# Altium PCB Dispenser.PcbDoc
Units mm, origin at the board's own origin, x right, y up, seen from the top; angles counter-clockwise.
Board outline 50.85 x 51.59 mm, 2 copper layers (Top Layer, Bottom Layer); 15 components, 16 nets, 77 pads, 11 vias.
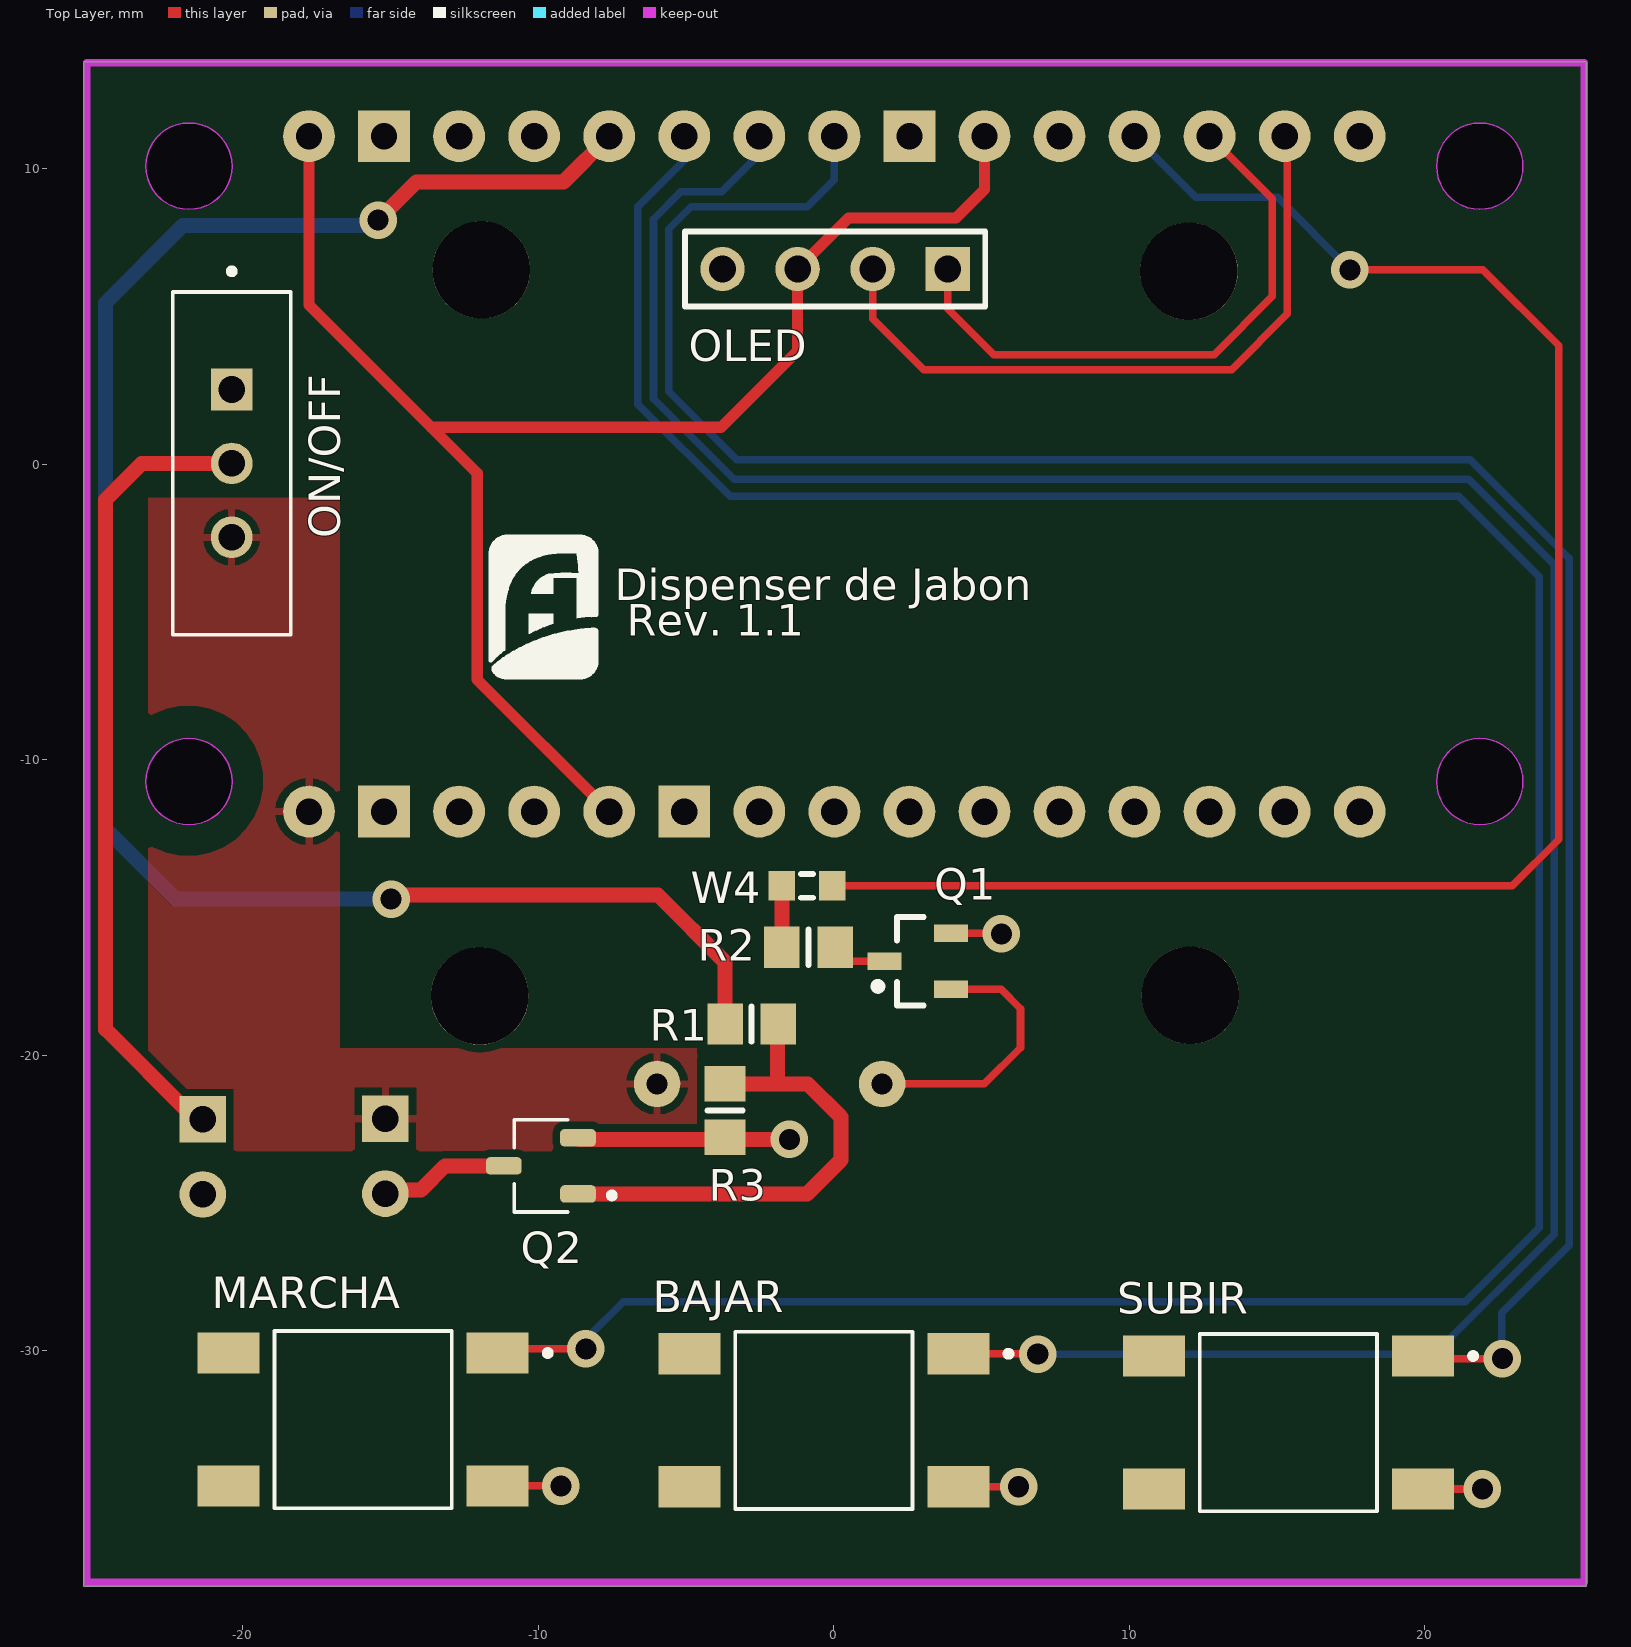
[diagram p0: Top Layer view]
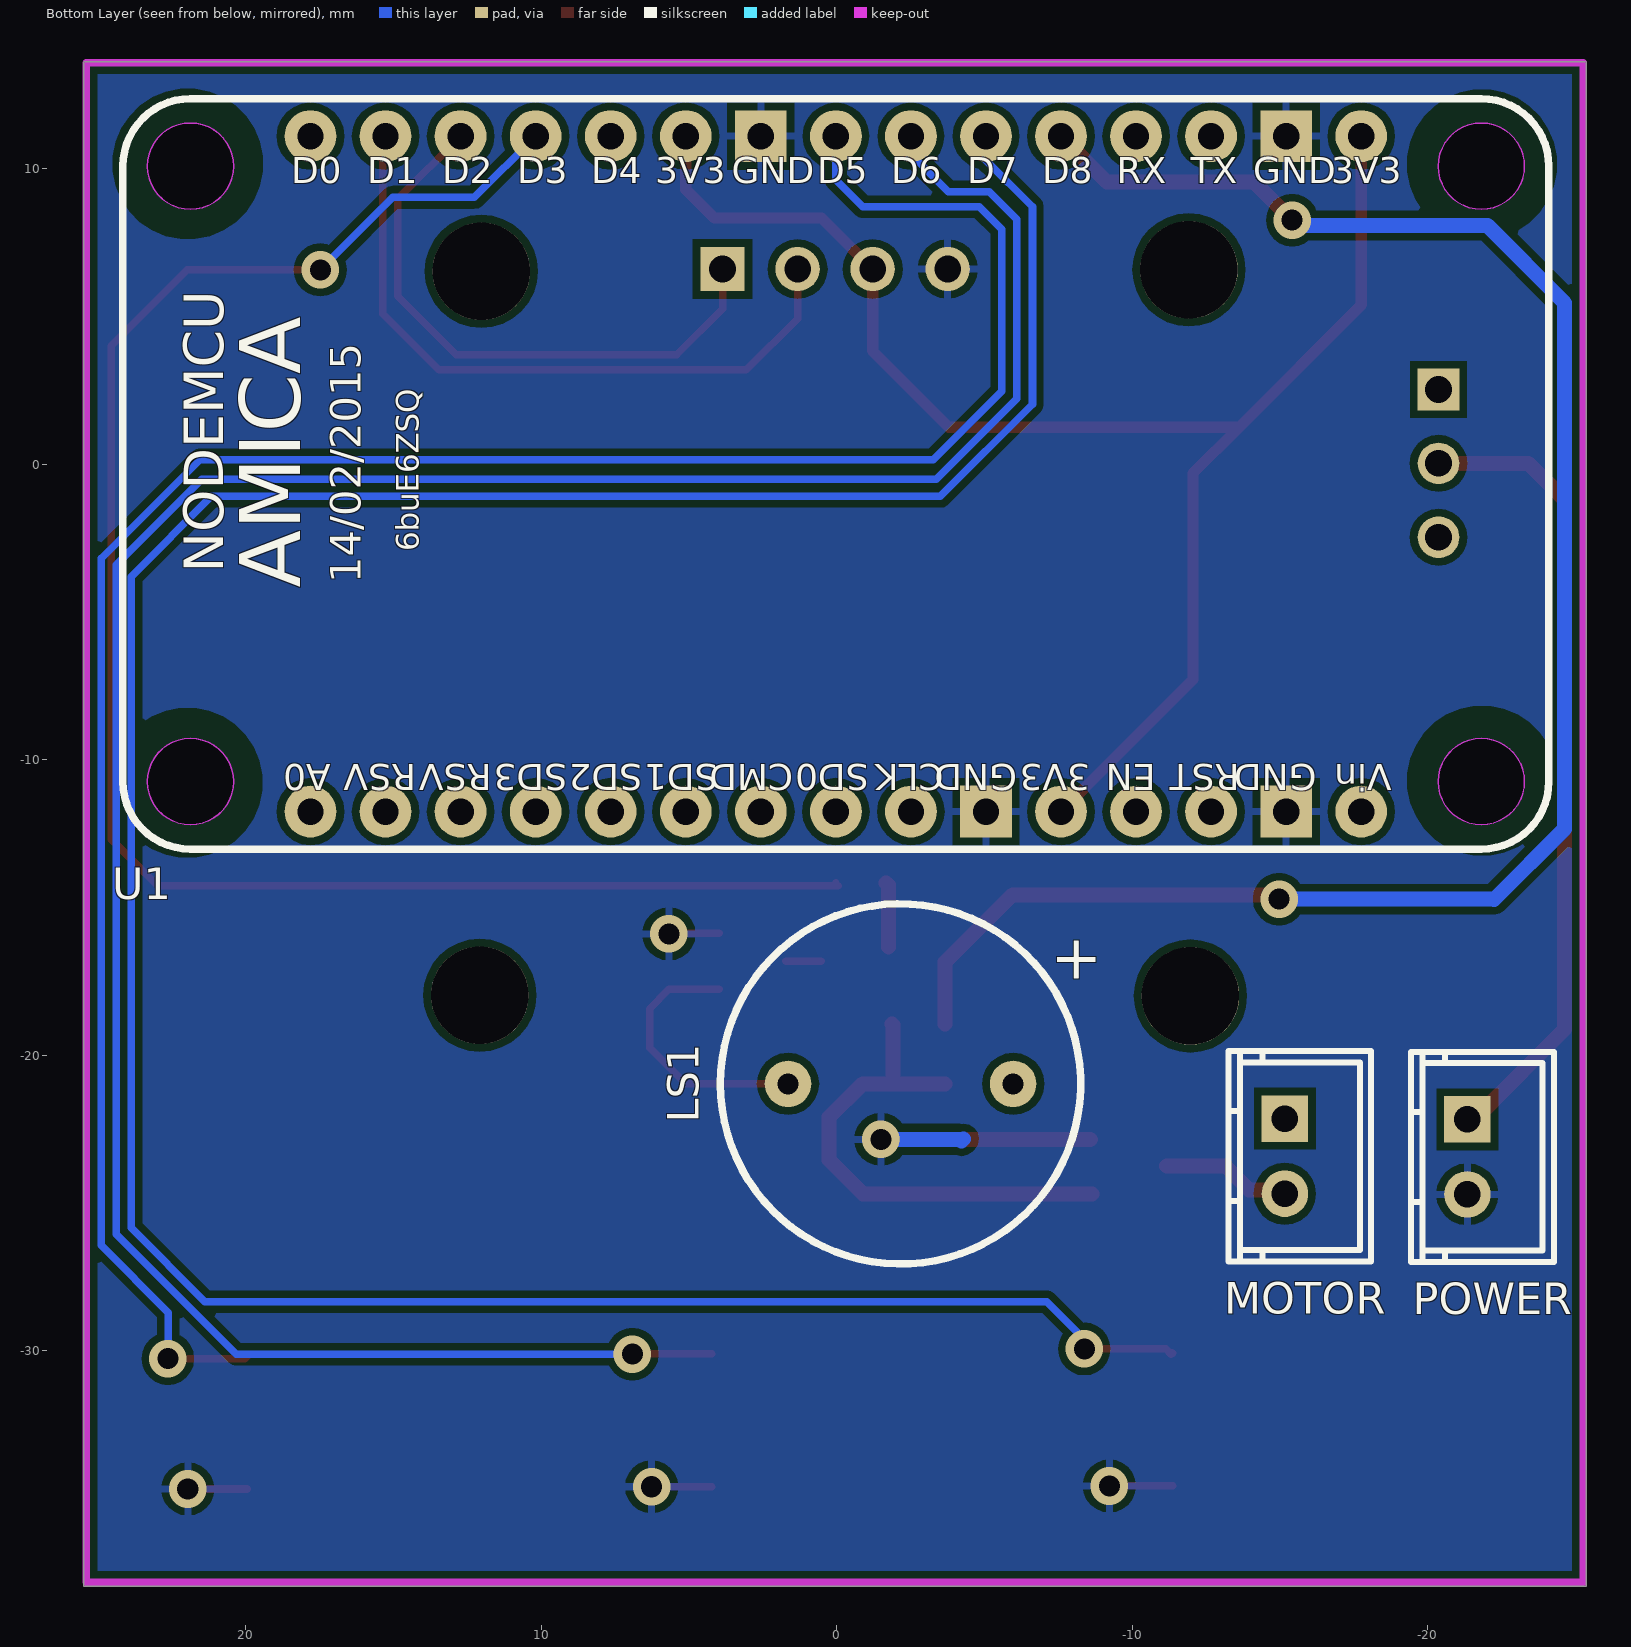
[diagram p1: Bottom Layer view, seen from below]

## Layer stack, top to bottom
Top Solder: solder mask 0.0102, Solder Resist, Dk 3.5
Top Layer: signal copper 0.0356
Dielectric 1: dielectric 0.32, FR-4, Dk 4.8
Bottom Layer: signal copper 0.0356
Bottom Solder: solder mask 0.0102, Solder Resist, Dk 3.5

## Board outline
-25.375,13.614 -25.375,-37.973 25.476,-37.973 25.476,13.614

## Design rules (kind name [scope] priority, off if disabled: settings)
Clearance [All] p1: gap=0.254
HoleSize [All] p1: absolutevalues=TRUE maxlimit=5.08 minlimit=0.025 maxpercent=80.000 minpercent=20.000
PolygonConnect [All] p1: connectstyle=Relief reliefconductorwidth=0.254 reliefentries=4 polygonreliefangle="90 Angle" airgapwidth=0.254
RoutingVias [All] p1: holewidth=0.711 width=1.27 viastyle="Through Hole" minholewidth=0.406 minwidth=0.813 maxholewidth=0.711 maxwidth=1.27
SolderMaskExpansion [All] p1: expansion=0.102
Width [All] p1: maxlimit=0.635 minlimit=0.254 preferedwidth=0.254
29 further rules are at their usual default settings.

## Components (designator, comment, footprint, x,y, rotation, side; value= is the part's Value field where it differs from the comment)
BAJAR "RESTAR_LITROS" SW_TL3301FF160QG -0.33,-32.36 r180 top (schematic designator S3)
LS1 "Buzzer 3V" BUZZER -5.975,-20.975 r180 bottom
MARCHA "MARCHA" SW_TL3301FF160QG -15.926,-32.334 r180 top (schematic designator S1)
MOTOR "MOTOR" CON1X2 -15.173,-22.152 r270 bottom (schematic designator P3)
OLED "Oled" HDR1X4 3.861,6.604 r180 top (schematic designator P2)
ON/OFF "POWER" SW_MINI-SPDT-SW -20.371,0.025 r270 top (schematic designator S4)
POWER "+5V" CON1X2 -21.35,-22.175 r270 bottom (schematic designator P1)
Q1 "MMBT3904" SOT23_N 2.85,-16.825 r180 top
Q2 "AO3402" SOT95P280X125-3N -9.906,-23.749 r180 top
R1 "1k" RESC2012N -2.775,-18.95 r0 top
R2 "1k" RESC2012N -0.85,-16.35 r0 top
R3 "10k" RESC2012N -3.675,-21.875 r90 top
SUBIR "SUMAR_LITROS" SW_TL3301FF160QG 15.392,-32.436 r180 top (schematic designator S2)
U1 "NodeMCU V1.0 ESP-12E" "NodeMCU V1.0 ESP-12E" 17.805,11.1 r90 bottom
W4 "Jumper" RESC1608N -0.9,-14.275 r180 top

## Footprints (in the part's own frame and the unit in brackets; to place one, negate y for a bottom-side part, rotate by r counter-clockwise, add the part's x,y. Pads: shape width x height; smd on the part's side, far side on the other; paste and mask are expansions set on the pad)
BUZZER [mil]
  round 62 hole 28: 1(0,0) 2(-300,0)
  silkscreen extent -390,-240 90,240
CON1X2 [mil] "Connector; Header; 2 Position"
  rect 62x62 hole 35.43: 1(0,0)
  round 62 hole 35.43: 2(100,0)
  silkscreen extent -90,-75 190,115, body extent -93,-88 199,138, height 276
HDR1X4 [mm] "Connector; Header; 4 Position"
  rect 1.5x1.5 hole 0.9: 1(0,0)
  round 1.5 hole 0.9: 2(2.54,0) 3(5.08,0) 4(7.62,0)
  silkscreen extent -1.27,-1.27 8.89,1.27
"NodeMCU V1.0 ESP-12E" [mil]
  round 115 hole 115 unplated paste-300 mask-300: 0(-860,-1560) 0(-860,160) 0(-40,-1560) 0(-40,160)
  round 69 hole 35: 3V3(-900,-1000) 3V3(0,-1400) 3V3(0,-500) A0(-900,0) CLK(-900,-800) CMD(-900,-600) D0(0,0) D1(0,-100) D2(0,-200) D3(0,-300) D4(0,-400) D5(0,-700) D6(0,-800) D7(0,-900) D8(0,-1000) EN(-900,-1100) RST(-900,-1200) RSV(-900,-200) RSV(-900,-100) RX(0,-1100) SD0(-900,-700) SD1(-900,-500) SD2(-900,-400) SD3(-900,-300) TX(0,-1200) VIN(-900,-1400)
  rect 69x69 hole 35: GND(-900,-1300) GND(-900,-900) GND(0,-1300) GND(0,-600)
  Keep-Out Layer circle w2: c-860,160 r57.5
  Keep-Out Layer circle w2: c-40,160 r57.5
  Keep-Out Layer circle w2: c-860,-1560 r57.5
  Keep-Out Layer circle w2: c-40,-1560 r57.5
  silkscreen extent -950,-1650 50,250
RESC1608N [mm] "Chip Resistor, Body 1.6x0.8mm, IPC Medium Density"
  rect 0.9x1 smd: 1(-0.85,0) 2(0.85,0)
  silkscreen extent -0.2,-0.4 0.2,0.4, body extent -0.85,-0.48 0.85,0.48, height 0.6
RESC2012N [mm] "Chip Resistor, Body 2.0x1.3mm, IPC Medium Density"
  rect 1.2x1.4 smd: 1(-0.9,0) 2(0.9,0)
  silkscreen extent 0,-0.6 0,0.6, body extent -1.07,-0.7 1.07,0.7, height 0.65
SOT23_N [mm] "SOT23, 3-Leads, Body 2.9x1.3mm, Pitch 0.95mm, Lead Span 2.3mm - Reverse Pinning, IPC Medium Density"
  rect 1.15x0.6 smd: 1(1.125,0) 2(-1.125,-0.95) 3(-1.125,0.95)
  silkscreen extent -0.2,-1.5 1.47,1.5, body extent -0.7,-1.5 0.7,1.5, height 1.1
SOT95P280X125-3N [mm]
  rrect50% 1.21x0.59 smd: 1(-1.255,0.95) 2(-1.255,-0.95) 3(1.255,0)
  silkscreen extent -2.5,-1.56 0.9,1.56
SW_MINI-SPDT-SW [mm]
  rect 1.408x1.408 hole 0.9: 1(-2.5,0)
  round 1.408 hole 0.9: 2(0,0) 3(2.5,0)
  silkscreen extent -6.6,-2 5.8,2
SW_TL3301FF160QG [mm]
  rect 2.1x1.4 smd: 1(-4.55,-2.25) 2(4.55,-2.25) 3(-4.55,2.25) 4(4.55,2.25)
  silkscreen extent -6.35,-3 3,3, body extent -5,-3 5,3, height 7.1

## Part data
BAJAR MARCHA SUBIR: library part TL3301FF160QG, "SWITCH TACTILE SPST-NO 0.05A 12V"
LS1: library part Bell, "Electrical Bell"
MOTOR POWER: library part "Header 2", "Header, 2-Pin"
OLED: library part "Header 4", "Header, 4-Pin"
ON/OFF: library part MINI-SPDT-SW, "Simple breadboard friendly SPDT slide switch. Rated at 30V/200mA with operating force of 250 +/-100gf."
Q1: "NPN Switching Transistor"
Q2: "N-Channel 30V 4A _Ta_ 1.4W _Ta_ Surface Mount SOT-23-3L"
R1 R2 R3: library part Res1, "Resistor"
U1: "NodeMCU V1.0 ESP8266 (ESP-12E)"
W4: "Jumper Wire"

## Free pads (board coordinates)
  round 3.3 hole 3.3 unplated paste-7.62 mask-7.62: 2(-11.975,-18) 2(-11.925,6.575) 2(12.025,6.525) 2(12.075,-17.975)

## Via types
v1: diameter 1.27, hole 0.711, Top Layer to Bottom Layer, 11 vias

## Nets (pads, with @x,y where several pads share a name; then routed paths per layer and width w, separated by ;. In a path a pad name is that pad's centre, name@x,y a point inside that pad or via, vN(x,y) a via of type N, cw(c..) or ccw(c..) an arc to the next point about the centre after c; other vN are vias at no path point)
3V3: OLED.3 U1.3V3 | length 52.5
  Top Layer w0.381: U1.3V3@-17.755,11.1 -17.755,5.385 -13.614,1.245 ; U1.3V3@-7.595,-11.76 -12.065,-7.29 -12.065,-0.305 -13.614,1.245 ; U1.3V3@5.105,11.1 5.105,9.296 4.14,8.331 0.508,8.331 OLED.3 -1.219,3.835 -3.81,1.245 -13.614,1.245
+5V: LS1.1 MOTOR.1 ON/OFF.3 U1.VIN
BTN_+L: SUBIR.1 U1.D5 | length 76.8
  Top Layer w0.254: SUBIR.1 20.033,-30.277 v1(22.631,-30.277)
  Bottom Layer w0.254: U1.D5 0.025,9.627 -0.889,8.712 -4.826,8.712 -5.588,7.95 -5.588,2.464 -3.277,0.152 21.546,0.152 24.892,-3.193 24.892,-26.441 22.619,-28.715 22.619,-30.264 v1(22.631,-30.277)
BTN_-L: BAJAR.1 U1.D6 | length 88.5
  Top Layer w0.254: BAJAR.1 6.894,-30.11 v1(6.909,-30.124)
  Bottom Layer w0.254: U1.D6@-2.337,11.049 -2.337,10.668 -3.785,9.22 -5.167,9.22 -6.096,8.291 -6.096,2.217 -3.371,-0.508 21.488,-0.508 24.384,-3.404 24.384,-26.06 20.32,-30.124 v1(6.909,-30.124)
BTN_MOT: MARCHA.1 U1.D7 | length 101.9
  Top Layer w0.254: MARCHA.1 -11.365,-30.074 -11.314,-30.124 -11.137,-29.947 v1(-8.382,-29.947)
  Bottom Layer w0.254: v1(-8.382,-29.947) -8.382,-29.616 -7.112,-28.346 21.38,-28.346 23.876,-25.85 23.876,-3.81 21.158,-1.092 -3.505,-1.092 -6.629,2.032 -6.629,8.712 -5.055,10.287 U1.D7
BUZZER: U1.D3 W4.1 | length 59.3
  Top Layer w0.254: W4.1 22.975,-14.275 24.55,-12.7 24.55,4 21.975,6.575 v1(17.475,6.575)
  Bottom Layer w0.254: U1.D3 12.26,9.025 15.025,9.025 v1(17.475,6.575)
GND: BAJAR.3 MARCHA.3 OLED.4 POWER.2 Q1.2 Q2.2 R3.1 SUBIR.3 U1.GND | length 17.9
  Top Layer w0.254: MARCHA.3 v1(-9.231,-34.584) ; Q1.2 v1@5.65,-15.875 ; BAJAR.3 v1(6.263,-34.61) ; SUBIR.3 v1(21.96,-34.686)
  Top Layer w0.508: Q2.2@-8.6,-22.85 v1(-1.5,-22.85) ; v1@5.65,-15.875 v1(5.675,-15.9)
  Bottom Layer w0.508: -4.293,-22.835 -4.227,-22.9 -4.177,-22.85 v1(-1.5,-22.85)
NetLS1_2: LS1.2 Q1.3 | length 9.4
  Top Layer w0.254: LS1.2@1.645,-20.375 2.245,-20.975 5.1,-20.975 6.325,-19.75 6.325,-18.425 5.675,-17.775 Q1.3
NetP1_1: ON/OFF.2 POWER.1 | length 27.2
  Top Layer w0.508: POWER.1@-21.3,-21.975 -21.789,-21.975 -24.638,-19.126 -24.638,-1.194 -23.419,0.025 ON/OFF.2
NetP3_2: MOTOR.2 Q2.3 | length 4.5
  Top Layer w0.508: MOTOR.2@-15.3,-24.565 -13.965,-24.565 -13.149,-23.749 Q2.3
NetQ1_1: Q1.1 R2.2 | length 1.2
  Top Layer w0.254: R2.2@0.525,-16.825 Q1.1
NetQ2_1: Q2.1 R1.2 R3.2 | length 17.3
  Top Layer w0.508: Q2.1 -0.899,-24.699 0.25,-23.55 0.25,-22.1 -0.875,-20.975 -1.9,-20.975 ; R3.2 -1.9,-20.975 ; R1.2 -1.9,-18.975 -1.9,-20.975
NetR2_1: R2.1 W4.2 | length 2.2
  Top Layer w0.508: R2.1 -1.75,-14.25 W4.2@-1.675,-14.175
SCL: OLED.2 U1.D1 | length 23.3
  Top Layer w0.254: OLED.2 1.321,4.928 3.056,3.192 13.467,3.192 15.358,5.083 15.358,11.007 U1.D1
SDA: OLED.1 U1.D2 | length 20.1
  Top Layer w0.254: OLED.1 3.861,5.258 5.419,3.7 12.875,3.7 14.85,5.675 14.85,8.975 U1.D2
SET_MOT: R1.1 U1.D8 | length 62.3
  Top Layer w0.508: v1(-15.418,8.255) -14.122,9.55 -9.144,9.55 U1.D8 U1.D8@-7.569,11.074 ; v1(-14.975,-14.725) -14.825,-14.575 -5.95,-14.575 -3.675,-16.85 R1.1
  Bottom Layer w0.508: v1(-15.418,8.255) -15.6,8.073 -22.026,8.073 -24.638,5.461 -24.638,-12.344 -22.254,-14.729 -22.25,-14.725 v1(-14.975,-14.725)
pads on no net: BAJAR.2 BAJAR.4 MARCHA.2 MARCHA.4 ON/OFF.1 SUBIR.2 SUBIR.4 U1.0 U1.A0 U1.CLK U1.CMD U1.D0 U1.D4 U1.EN U1.RST U1.RSV U1.RX U1.SD0 U1.SD1 U1.SD2 U1.SD3 U1.TX

## Polygon pours and split planes (outlines as drawn)
+5V on Top Layer "+5V_L01_P024" (solid, pour order 24): -23.196,-1.143 -19.939,-1.143 -16.713,-1.143 -16.713,-8.687 -16.713,-19.775 -4.625,-19.775 -4.564,-23.25 -15.425,-23.25 -18.15,-23.25 -23.196,-23.25
GND on Bottom Layer "GND_L02_P026" (solid, pour order 26): -25.273,13.589 25.4,13.589 25.4,-37.846 -25.273,-37.846 -25.273,13.589

## Keep-outs
Keep-Out Layer:
  lines w0.254: -25.273,-37.846 -25.273,13.589 25.4,13.589 25.4,-37.846 -25.273,-37.846

## Other copper
Multi-Layer:
  pour cut-out: -24.382,10.147 ccw(c-21.842,10.147) -21.842,7.607 ccw(c-21.842,10.147) -19.302,10.147 ccw(c-21.842,10.147) -21.842,12.687 ccw(c-21.842,10.147)
  pour cut-out: 19.429,-10.783 ccw(c21.969,-10.783) 21.969,-13.323 ccw(c21.969,-10.783) 24.509,-10.783 ccw(c21.969,-10.783) 21.969,-8.243 ccw(c21.969,-10.783)
  pour cut-out: -24.384,-10.717 ccw(c-21.844,-10.717) -21.844,-13.257 ccw(c-21.844,-10.717) -19.304,-10.717 ccw(c-21.844,-10.717) -21.844,-8.177 ccw(c-21.844,-10.717)
  pour cut-out: 19.419,10.162 ccw(c21.959,10.162) 21.959,7.622 ccw(c21.959,10.162) 24.499,10.162 ccw(c21.959,10.162) 21.959,12.702 ccw(c21.959,10.162)

## Silkscreen, mask and mechanical layers (free items; w line width, h text height)
Top Overlay:
  drawing of 3 lines, arcs and shapes, not listed
  text "Dispenser de Jabon" at -7.4,-4.6 h1.07
  text "Rev. 1.1" at -7,-5.8 h1.07

## Text inside footprints (layer, text, board x,y; h text height)
LS1: Bottom Overlay "+" at -7.245,-17.419 h1.52
U1: Bottom Overlay "GND" at -6.121,-9.855 h1.52 r180; Bottom Overlay "3V3" at -8.585,-9.855 h1.52 r180; Bottom Overlay "EN" at -10.795,-9.855 h1.52 r180; Bottom Overlay "RST" at -13.64,-9.855 h1.52 r180; Bottom Overlay "GND" at -16.256,-9.855 h1.52 r180; Bottom Overlay "Vin" at -18.796,-9.855 h1.52 r180; Bottom Overlay "D7" at -4.425,9.195 h1.52; Bottom Overlay "D8" at -6.962,9.195 h1.52; Bottom Overlay "RX" at -9.476,9.195 h1.52; Bottom Overlay "TX" at -11.989,9.195 h1.52; Bottom Overlay "GND" at -14.102,9.195 h1.52; Bottom Overlay "3V3" at -16.739,9.195 h1.52; Bottom Overlay "D6" at -1.857,9.195 h1.52; Bottom Overlay "CMD" at 1.47,-9.855 h1.52 r180; Bottom Overlay "D0" at 18.466,9.195 h1.52; Bottom Overlay "D1" at 15.892,9.195 h1.52; Bottom Overlay "D2" at 13.346,9.195 h1.52; Bottom Overlay "D3" at 10.806,9.195 h1.52; Bottom Overlay "D4" at 8.306,9.195 h1.52; Bottom Overlay "3V3" at 6.147,9.195 h1.52; Bottom Overlay "GND" at 3.556,9.195 h1.52; Bottom Overlay "D5" at 0.66,9.195 h1.52; Bottom Overlay "A0" at 17.12,-9.855 h1.52 r180; Bottom Overlay "RSV" at 14.224,-9.855 h1.52 r180; Bottom Overlay "RSV" at 11.673,-9.855 h1.52 r180; Bottom Overlay "SD3" at 9.122,-9.855 h1.52 r180; Bottom Overlay "SD2" at 6.571,-9.855 h1.52 r180; Bottom Overlay "SD1" at 4.02,-9.855 h1.52 r180; Bottom Overlay "SD0" at -1.081,-9.855 h1.52 r180; Bottom Overlay "CLK" at -3.632,-9.855 h1.52 r180; Bottom Overlay "6buE6ZSQ" at 14.148,-2.946 h0.76 r270; Bottom Overlay "NODEMCU" at 20.32,-3.683 h2.29 r270; Bottom Overlay "AMICA" at 17.475,-4.191 h3.56 r270; Bottom Overlay "14/02/2015" at 15.773,-4.039 h1.75 r270